# Altium PCB PCB1.PcbDoc
Units mm, origin at the board's own origin, x right, y up, seen from the top; angles counter-clockwise.
Board outline 76.83 x 70.74 mm, 2 copper layers (Top Layer, Bottom Layer); 20 components, 12 nets, 44 pads, 0 vias.
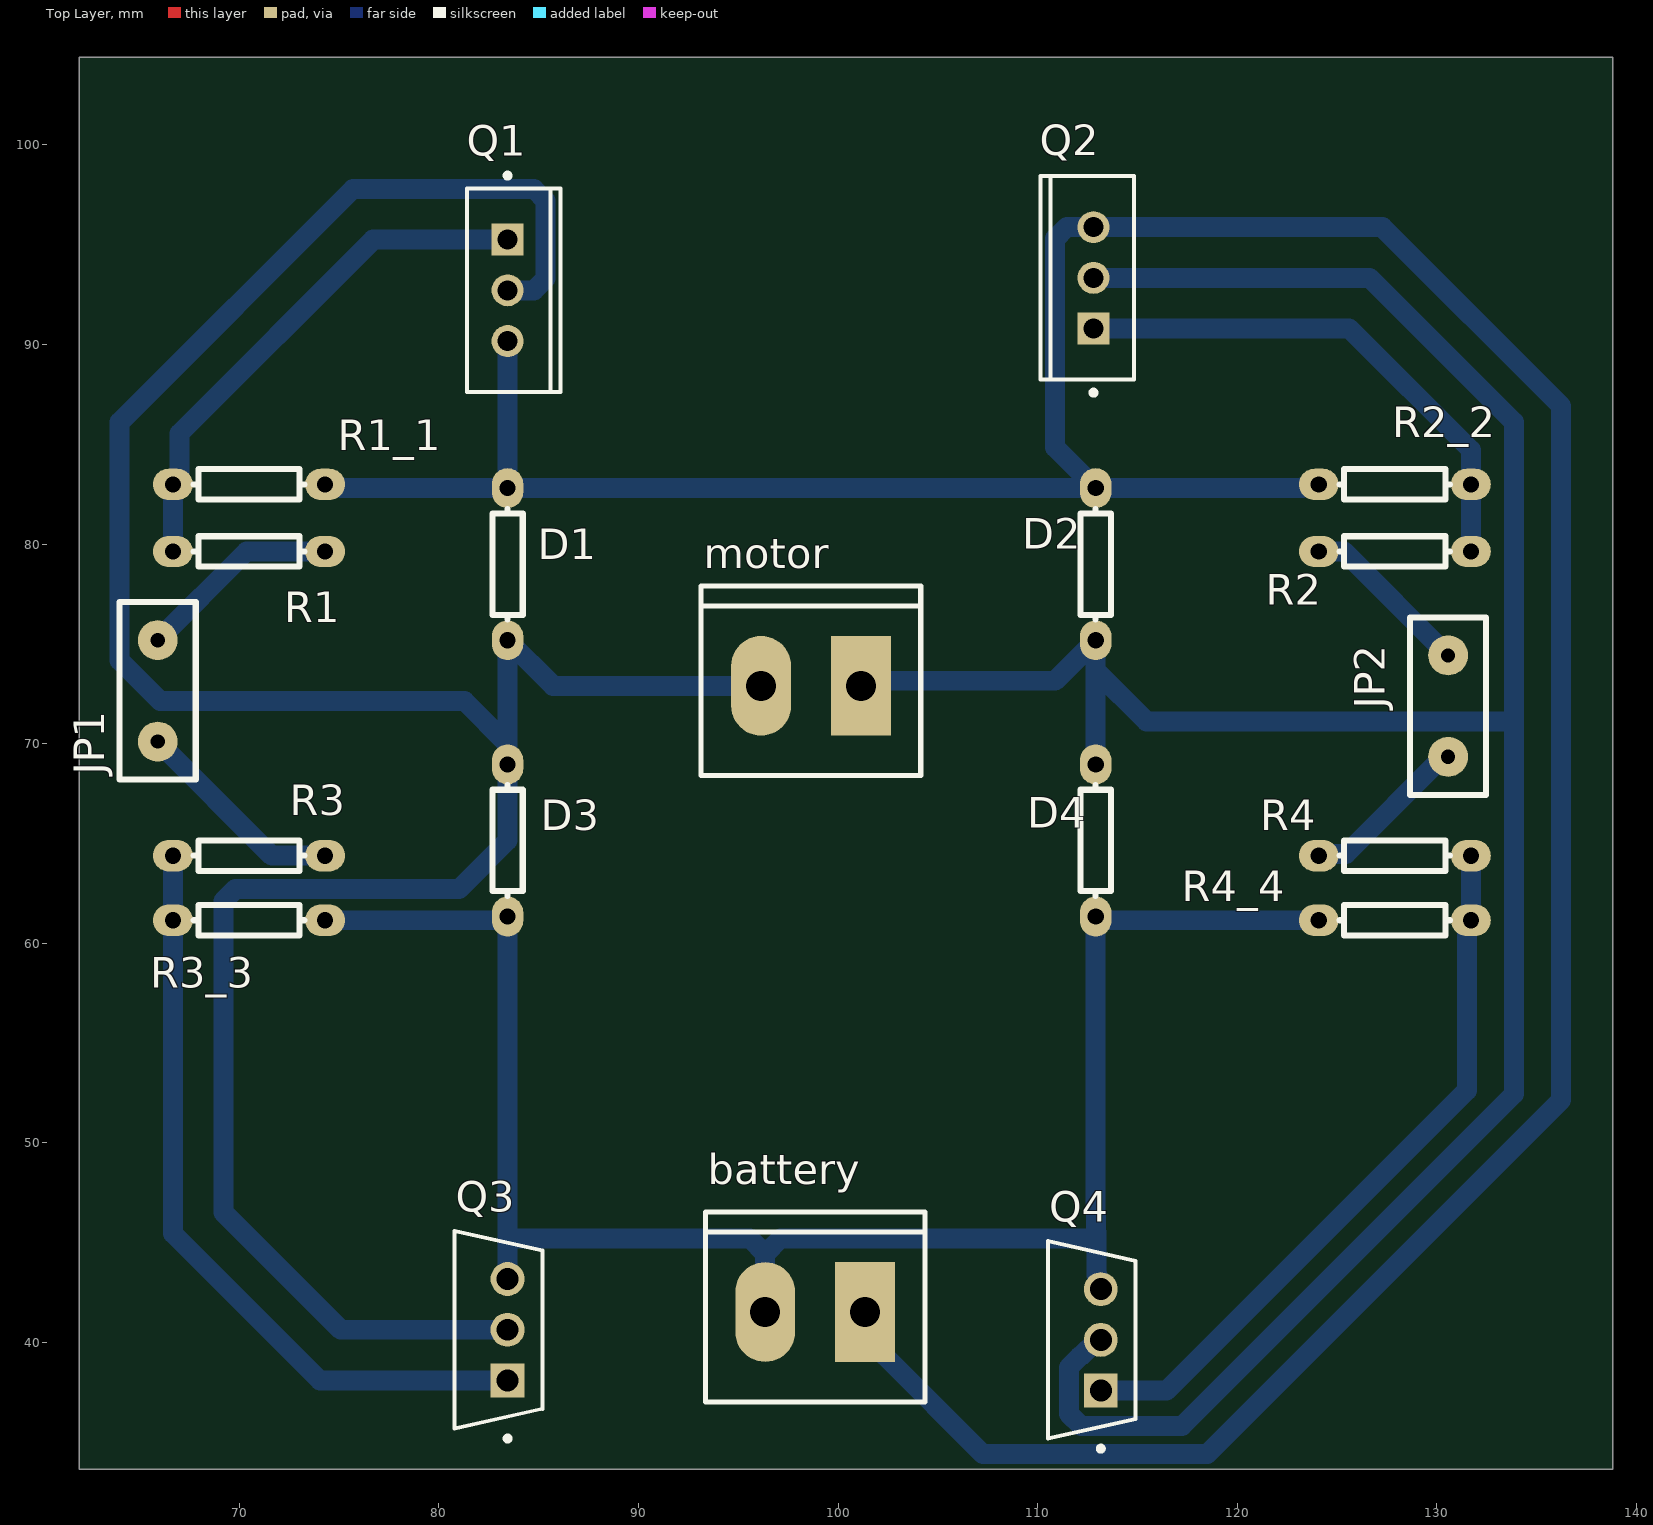
[diagram p0: Top Layer view]
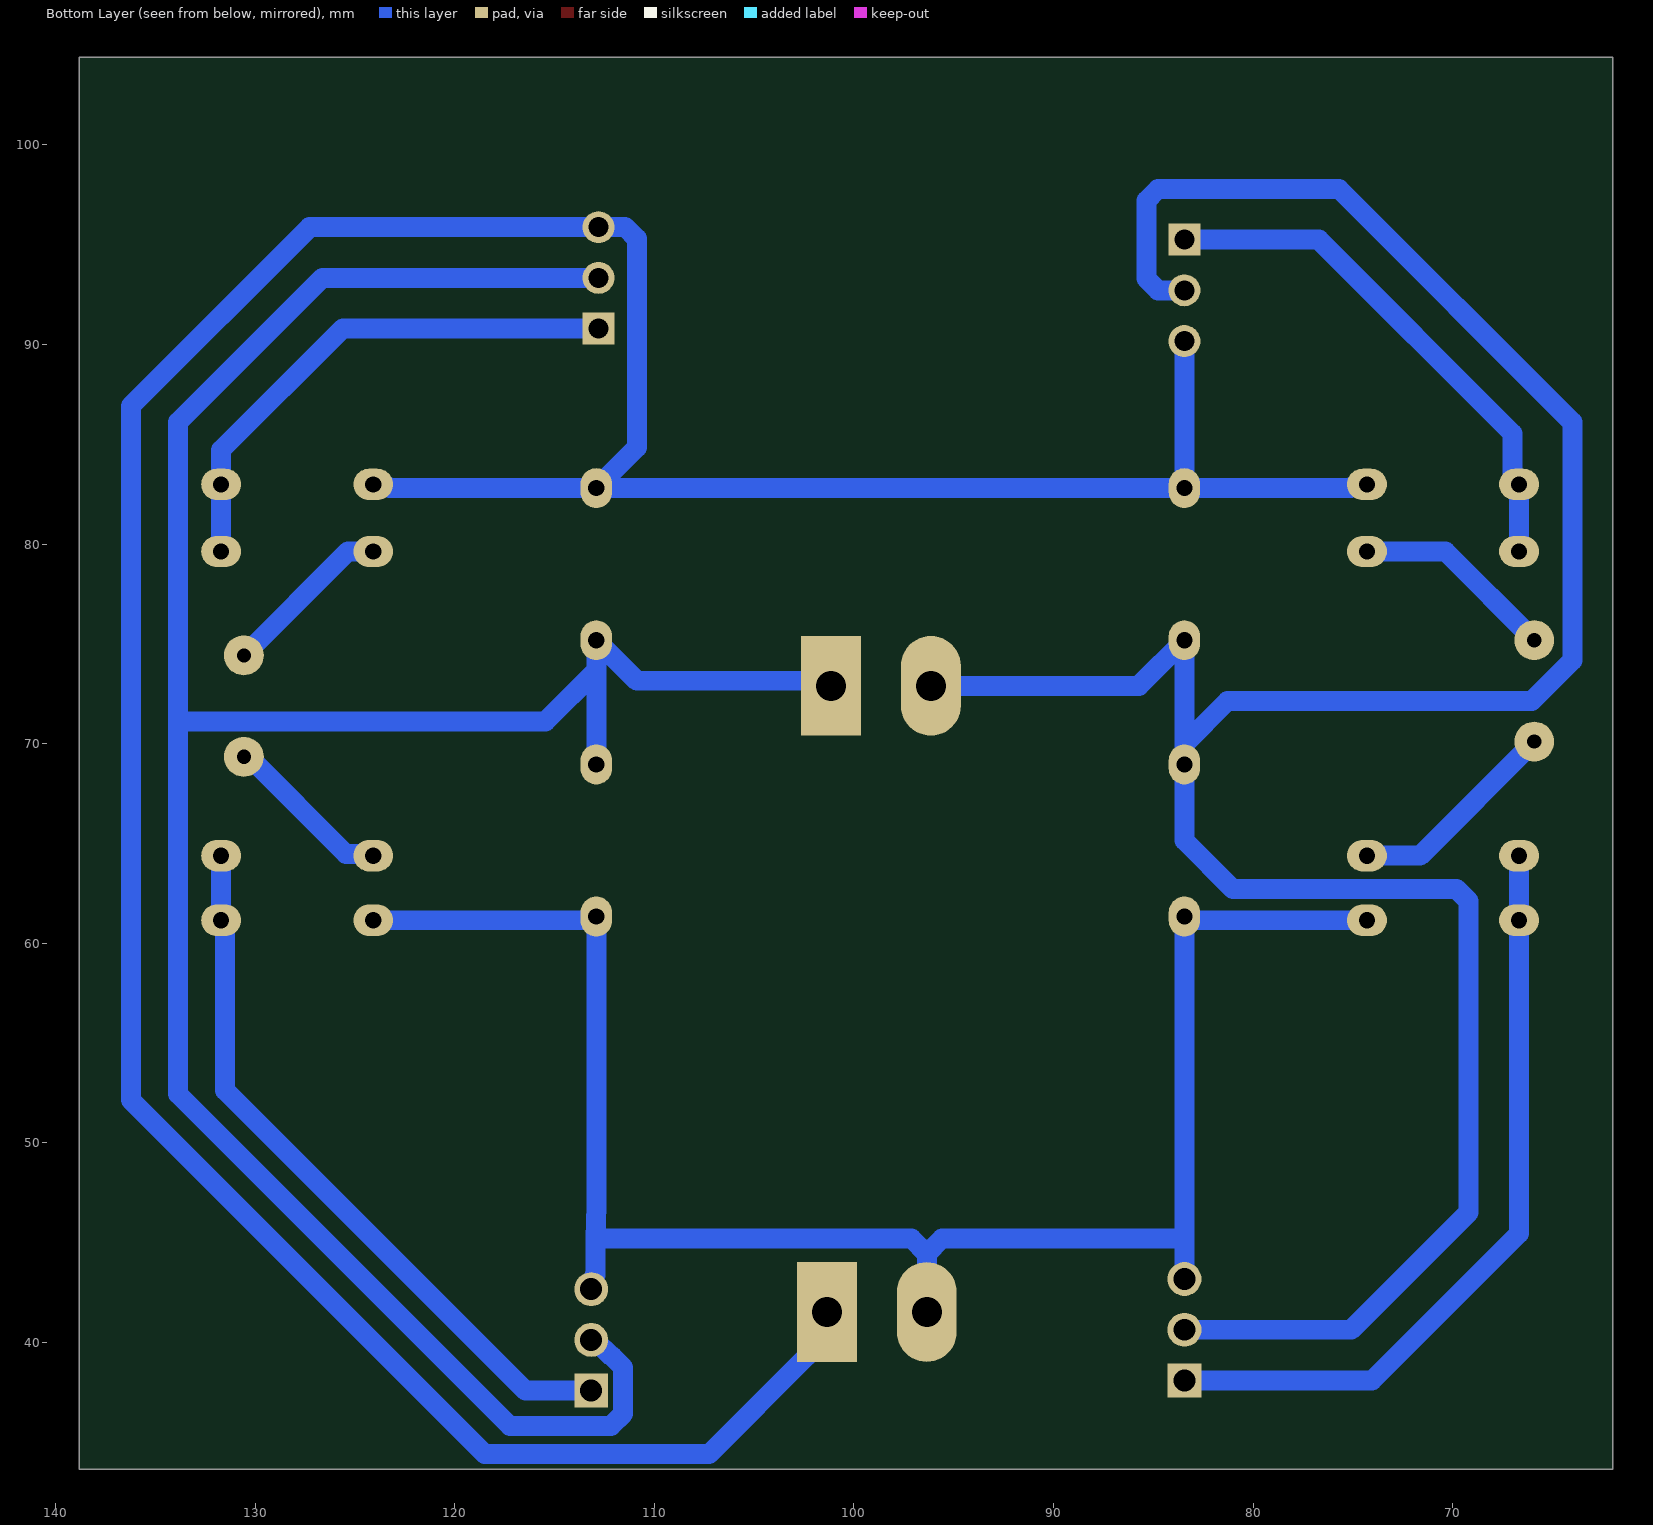
[diagram p1: Bottom Layer view, seen from below]

## Layer stack, top to bottom
Top Solder: solder mask 0.0102, Solder Resist, Dk 3.5
Top Layer: signal copper 0.0356
Dielectric 1: dielectric 0.32, FR-4, Dk 4.8
Bottom Layer: signal copper 0.0356
Bottom Solder: solder mask 0.0102, Solder Resist, Dk 3.5

## Board outline
61.976,33.655 138.811,33.655 138.811,104.394 61.976,104.394

## Design rules (kind name [scope] priority, off if disabled: settings)
Clearance [All] p1: gap=0.25 ignorepadtopadclearanceinfootprint=FALSE
PolygonConnect [All] p1: connectstyle=Relief reliefconductorwidth=0.254 reliefentries=4 polygonreliefangle="90 Angle" airgapwidth=0.254
RoutingLayers [All] p1: top layer_v5=FALSE bottom layer_v5=TRUE
RoutingVias [All] p1: holewidth=0.711 width=1.27 viastyle="Through Hole" minholewidth=0.711 minwidth=1.27 maxholewidth=0.711 maxwidth=1.27
SolderMaskExpansion [All] p1: expansion=0.102 istentingtop=FALSE
SupplyNets "Schematic Supply Nets" [InNet('GND')] p1: voltage=0.000
UnRoutedNet [All] p1: checkbadconnections=TRUE
Width [All] p1: maxlimit=1 minlimit=0.75 preferedwidth=1
28 further rules are at their usual default settings.

## Components (designator, comment, footprint, x,y, rotation, side; value= is the part's Value field where it differs from the comment)
battery "Terminal" "Terminal Block 2 Pin" 100.846,29.029 r0 top
D1 "DIODE" AXIAL0.3 83.439,75.184 r90 top
D2 "DIODE" AXIAL0.3 112.903,75.184 r90 top
D3 "DIODE" AXIAL0.3 83.439,61.341 r90 top
D4 "DIODE" AXIAL0.3 112.903,61.341 r90 top
JP1 "HEADER 2" RAD0.2 65.913,70.104 r90 top
JP2 "HEADER 2" RAD0.2 130.556,74.422 r270 top
motor "Terminal" "Terminal Block 2 Pin" 100.639,60.398 r0 top
Q1 "FQP27P06" FAIR-TO-220-3 83.439,92.71 r0 top
Q2 "FQP27P06" FAIR-TO-220-3 112.792,93.335 r180 top
Q3 "BUZ101L" FP-BUZ101L-MFG 82.989,40.64 r180 top
Q4 "BUZ101L" FP-BUZ101L-MFG 112.707,40.132 r180 top
R1 "50 ohm" AXIAL0.3 74.295,79.629 r180 top
R1_1 "10k ohm" AXIAL0.3 66.675,82.991 r0 top
R2 "50 ohm" AXIAL0.3 131.699,79.629 r180 top
R2_2 "10k ohm" AXIAL0.3 131.699,82.991 r180 top
R3 "50 ohm" AXIAL0.3 74.295,64.389 r180 top
R3_3 "10k ohm" AXIAL0.3 74.295,61.154 r180 top
R4 "50 ohm" AXIAL0.3 131.699,64.389 r180 top
R4_4 "10k ohm" AXIAL0.3 124.079,61.154 r0 top

## Footprints (in the part's own frame and the unit in brackets; to place one, negate y for a bottom-side part, rotate by r counter-clockwise, add the part's x,y. Pads: shape width x height; smd on the part's side, far side on the other; paste and mask are expansions set on the pad)
AXIAL0.3 [mil]
  oval 78.74x62 hole 32: 1(0,0) 2(300,0)
  silkscreen extent 41,-30 259,30
FAIR-TO-220-3 [mm] "FM, 3-Leads, Body 10.2x4.7mm, Pitch 2.54mm"
  rect 1.6x1.6 hole 1: 1(0,2.54)
  round 1.6 hole 1: 2(0,0) 3(0,-2.54)
  silkscreen extent -2.04,-5.1 2.66,5.87, body extent -2.04,-5.1 2.66,5.1, height 18.95
FP-BUZ101L-MFG [mm]
  rect 1.7x1.7 hole 1.1 paste-2539.97 mask+0: 1(-0.45,2.54)
  round 1.7 hole 1.1 paste-2539.97 mask+0: 2(-0.45,0) 3(-0.45,-2.54)
  silkscreen extent -2.2,-4.95 2.2,5.57, body extent -2.3,-5.05 2.3,5.05, height 0.25
RAD0.2 [mm]
  round 2 hole 0.711: 1(0,0) 2(5.08,0)
  silkscreen extent -1.91,-1.91 6.98,1.91
"Terminal Block 2 Pin" [mm]
  rect 3x5 hole 1.5: 1(0.5,12.5)
  oval 3x5 hole 1.5: 2(-4.5,12.5)
  silkscreen extent -7.5,8 3.5,17.5, body extent -7.08,8.3 3.68,16.5, height 10.25

## Part data
battery motor: library part "Terminal Block 2", "Connector blue screw"
D1 D2 D3 D4: "Diode"
Q1 Q2: library part CMP-2000-04936-1, "P-Channel QFET(R) MOSFET, -60 V, -27 A, -55 to 175 degC, 3-Pin TO-220, RoHS, Tube", Drain-Source On Resistance-Max=0.07O, Drain-to-Source Voltage [Vdss]=60V, Manufacturer=Fairchild, Package Description="3-Pin Through Hole Device, Body 10 x 4.5 mm, Pitch 2.54 mm", Package Reference=TO-220, Rated Power Dissipation=120W, Channel Type=P-Channel, Datasheet URL=https://www.fairchildsemi.com/datasheets/FQ/FQP27P06.pdf, Datasheet Version=Mar-13, Manufacturer URL=https://www.fairchildsemi.com/, Package URL=https://www.fairchildsemi.com/package-drawings/TO/TO220B03.pdf, Qg Gate Charge=33nC
Q3 Q4: library part CMP-00196-03831742-1, "BUZ101L Trans MOSFET N-CH 50V 29A 3-Pin TO-220AB", Case/Package=TO-220AB, Continuous Drain Current (ID)=29A, Drain to Source Voltage (Vdss)=50V, NexarPartId=3831742, RoHS=Non-Compliant
R1 R1_1 R2 R2_2 R3 R3_3 R4 R4_4: library part RES1

## Nets (pads, with @x,y where several pads share a name; then routed paths per layer and width w, separated by ;. In a path a pad name is that pad's centre, name@x,y a point inside that pad or via, vN(x,y) a via of type N, cw(c..) or ccw(c..) an arc to the next point about the centre after c; other vN are vias at no path point)
GND: battery.2 D3.1 D4.1 Q3.3 Q4.3 R3_3.1 R4_4.1 | length 90.5
  Bottom Layer w1: R3_3.1 83.252,61.154 D3.1 83.439,45.212 ; Q3.3 83.439,45.212 ; battery.2 96.346,44.45 ; Q4.3 113.023,42.806 113.023,43.301 112.953,43.371 112.953,45.212 ; R4_4.1 113.09,61.154 D4.1 112.903,46.863 112.953,45.212 ; 83.439,45.212 95.584,45.212 96.346,44.45 ; 96.346,44.45 97.108,45.212 112.953,45.212
Netbattery_1: battery.1 D1.2 D2.2 Q1.3 Q2.3 R1_1.2 R2_2.2 | length 180.6
  Bottom Layer w1: R1_1.2 74.405,82.881 75.024,82.881 75.101,82.804 D1.2 ; Q1.3 D1.2 ; battery.1 102.346,40.529 102.346,39.321 107.25,34.417 118.491,34.417 136.22,52.146 136.22,86.919 127.264,95.875 Q2.3 112.782,95.885 111.457,95.885 110.871,95.299 110.871,84.836 D2.2 ; R2_2.2 123.969,82.881 123.35,82.881 123.273,82.804 D2.2 ; D1.2 D2.2
NetD1_1: D1.1 D3.2 motor.2 Q1.2 Q3.2 | length 137
  Bottom Layer w1: Q3.2 75.082,40.64 69.215,46.507 69.215,62.127 69.801,62.713 81.001,62.713 83.439,65.151 D3.2 83.439,69.977 ; Q1.2 84.758,92.71 85.344,93.296 85.344,97.204 84.758,97.79 75.692,97.79 64.008,86.106 64.008,74.168 66.04,72.136 81.28,72.136 83.439,69.977 ; motor.2 85.725,72.898 D1.1 83.439,69.977
NetD2_1: D2.1 D4.2 motor.1 Q2.2 Q4.2 | length 132.6
  Bottom Layer w1: motor.1 101.393,73.152 110.871,73.152 D2.1 112.903,73.66 ; Q2.2 126.629,93.335 133.858,86.106 133.858,70.993 ; D4.2 112.903,73.66 ; Q4.2 112.968,40.132 112.127,39.291 112.095,39.291 111.557,38.753 111.557,36.431 112.174,35.814 117.221,35.814 133.858,52.451 133.858,70.993 ; 112.903,73.66 115.443,71.12 133.731,71.12 133.858,70.993
NetJP1_1: JP1.1 R3.1 | length 10.7
  Bottom Layer w1: JP1.1 71.628,64.389 R3.1
NetJP1_2: JP1.2 R1.1 | length 10.2
  Bottom Layer w1: JP1.2 70.358,79.629 R1.1
NetJP2_1: JP2.1 R2.2 | length 8.6
  Bottom Layer w1: R2.2 125.349,79.629 JP2.1
NetJP2_2: JP2.2 R4.2 | length 8.5
  Bottom Layer w1: R4.2 124.168,64.478 125.438,64.478 130.302,69.342 JP2.2
NetQ1_1: Q1.1 R1.2 R1_1.1 | length 26.7
  Bottom Layer w1: R1.2 R1_1.1 66.732,82.991 66.998,83.257 66.998,85.54 76.708,95.25 Q1.1@83.566,95.25
NetQ2_1: Q2.1 R2.1 R2_2.1 | length 26.5
  Bottom Layer w1: Q2.1@112.792,90.805 125.603,90.805 131.699,84.709 R2_2.1 R2.1
NetQ3_1: Q3.1 R3.2 R3_3.2 | length 38.7
  Bottom Layer w1: R3.2 R3_3.2 66.675,45.466 74.041,38.1 Q3.1
NetQ4_1: Q4.1 R4.1 R4_4.2 | length 36.4
  Bottom Layer w1: Q4.1 116.459,37.592 131.504,52.637 131.504,60.959 R4_4.2 R4.1